# Allegro board esp8266bee.brd
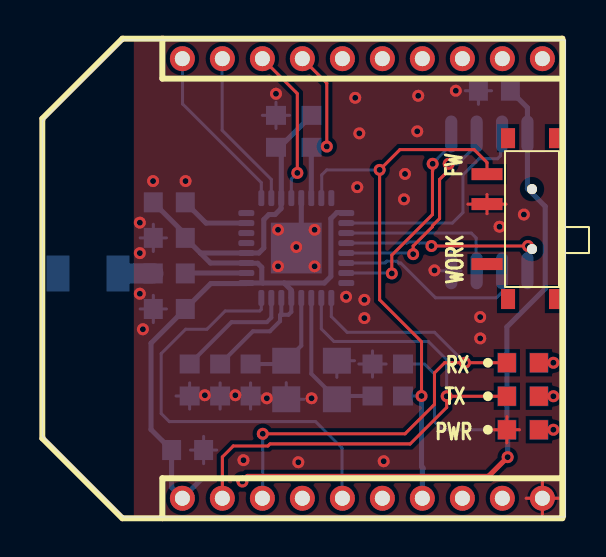
[diagram p0: board, top side]
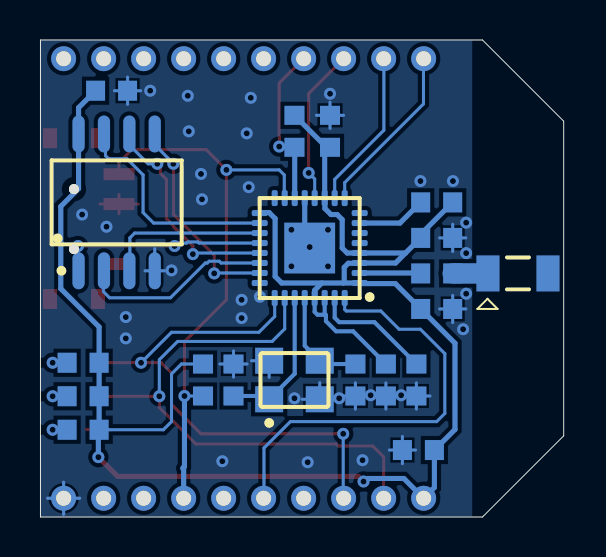
[diagram p1: board, bottom side, seen from below]

Outline 26.16 x 23.88 mm; copper layers: TOP, BOTTOM. Coordinates in mm from the lower left corner of the outline.
Outline path: 0,19.81 4.06,23.88 26.16,23.88 26.16,0 4.06,0 0,4.06 0,19.81

## Placement (name value [footprint] x y rotation side)
A1  -  [ANT1206]  2.29 12.19 180 bottom
A2  -  [BEE_SOCKET]  7 0.94 0 top
C1  -  [STD0603]  6.35 10.41 0 bottom
C2  -  [STD0603]  7.26 3.35 180 bottom
C13  -  [STD0603]  6.35 13.97 0 bottom
C14  -  [STD0603]  11.68 19.3 270 bottom
C18  -  [STD0603]  8.89 6.86 90 bottom
C19  -  [STD0603]  22.61 21.34 0 bottom
C20  -  [STD0603]  16.51 6.86 270 bottom
C21  -  [STD0603]  10.41 6.86 90 bottom
C27  -  [STD0603]  6.35 12.19 180 bottom
D1  -  [LED0603]  24.03 4.37 0 top
D2  -  [LED0603]  24.03 7.72 0 top
D3  -  [LED0603]  24.03 6.05 0 top
NOREF  -  []  25 0.94 90 top
NOREF#2  -  []  0 0 90 top
NOREF#3  -  []  0 0 0 top
NOREF#4  -  []  23 22.94 0 top
NOREF#5  -  []  0 0 90 top
R1  -  [STD0603]  24.03 4.37 0 bottom
R2  -  [STD0603]  24.03 7.72 0 bottom
R3  -  [STD0603]  24.03 6.05 0 bottom
R4  -  [STD0603]  7.37 6.86 270 bottom
R5  -  [STD0603]  13.46 19.3 90 bottom
R6  -  [STD0603]  6.35 15.75 180 bottom
R7  -  [STD0603]  18.03 6.86 90 bottom
S1  -  [1P2T_SMT]  27.34 19.56 180 top
U3  val  [QFN50P500X500X80-33A]  12.7 13.46 0 bottom
U6  val  [SOIC127P780X200-8]  22.35 15.75 180 bottom
X2  val  [OSCCC250X320X100]  13.46 6.86 90 bottom

## Library data of the parts
A1 = ANT-SE: part number: ANT-SE-2450AT18B100E,1
A2 = BEE: part number: BEE-BEE,1
C1 C2 C13 C14 = CAP: part number: CAP-10UF/25V/0603,1
C18-C21 = CAP: part number: CAP-12PF/50V/0603,1
C27 = CAP: part number: CAP-10PF/50V/0603,1
D1 = LED: part number: LED-GREEN,1
D2 = LED: part number: LED-RED,1
D3 = LED: part number: LED-BLUE,1
R1-R3 = RES: part number: RES-1KR|J|0603,1
R4 = RES: part number: RES-12K|K|0603,1
R5-R7 = RES: part number: RES-10KR|J|0603,1
S1 = S_1P2T: part number: S_1P2T-SMD_7P,1
U3 = ESP8266: User Part Number: pn; Tolerance: RichardLC
U6 = 25Q80BVSIG: User Part Number: pn; Tolerance: RichardLC
X2 = XTAL4P: User Part Number: /; Tolerance: RichardLC; part number: XTAL4P-26MHZ,1

## Footprints (pads in the part's own frame, mm; a bottom-side part is the same pattern mirrored in y, then rotated)
1P2T_SMT
  rect 0.701x1.001 smd: (1.651,8.651) (1.651,0.599) (4.049,8.651) (4.049,0.599)
  round 0.5 hole 0.8 unplated: (2.85,6.149) (2.85,3.15)
  rect 1.549x0.599 smd: 1(5.1,2.4) 2(5.1,3.899) 3(5.1,6.901)
ANT1206
  rect 1.151x1.801 smd: 1(-1.501,0) 2(1.501,0)
BEE_SOCKET
  round 1.25 hole 0.749: 1(0,0) 2(1.999,0) 3(4,0) 4(5.999,0) 5(8.001,0) 6(10,0) 7(11.999,0) 8(14,0) 9(15.999,0) 10(18.001,0) 11(18.001,21.999) 12(15.999,21.999) 13(14,21.999) 14(11.999,21.999) 15(10,21.999) 16(8.001,21.999) 17(5.999,21.999) 18(4,21.999) 19(1.999,21.999) 20(0,21.999)
LED0603
  rect 0.899x0.95 smd: A(0.8,0) C(-0.8,0)
OSCCC250X320X100
  rect 1.3x1.4 smd: 1(-0.965,1.265) 2(-0.965,-1.265) 3(0.965,-1.265) 4(0.965,1.265)
QFN50P500X500X80-33A
  custom 0.798x0.3 smd: 1(-2.499,1.75) 2(-2.499,1.25) 3(-2.499,0.749) 4(-2.499,0.249) 5(-2.499,-0.249) 6(-2.499,-0.749) 7(-2.499,-1.25) 8(-2.499,-1.75) 17(2.499,-1.75) 18(2.499,-1.25) 19(2.499,-0.749) 20(2.499,-0.249) 21(2.499,0.249) 22(2.499,0.749) 23(2.499,1.25) 24(2.499,1.75)
  custom 0.3x0.798 smd: 9(-1.75,-2.499) 10(-1.25,-2.499) 11(-0.749,-2.499) 12(-0.249,-2.499) 13(0.249,-2.499) 14(0.749,-2.499) 15(1.25,-2.499) 16(1.75,-2.499) 25(1.75,2.499) 26(1.25,2.499) 27(0.749,2.499) 28(0.249,2.499) 29(-0.249,2.499) 30(-0.749,2.499) 31(-1.25,2.499) 32(-1.75,2.499)
  rect 2.54x2.54 smd: 33(0,0)
SOIC127P780X200-8
  oval 0.61x1.849 smd: 1(-1.905,-3.424) 2(-0.635,-3.424) 3(0.635,-3.424) 4(1.905,-3.424) 5(1.905,3.424) 6(0.635,3.424) 7(-0.635,3.424) 8(-1.905,3.424)
STD0603
  rect 0.95x1.001 smd: 1(-0.8,0) 2(0.8,0)

## Nets
GND: A2.10(GND) C1.1 C2.1 C13.1 C14.1 C18.1 C19.1 C20.1 C21.1 D1.C R4.2 S1.2(COM) U3.13(MTDO) U3.33(GND) U6.4(GND) X2.2 X2.4
VCC-3V3: A2.1(VCC) C1.2 C2.2 C13.2 C14.2 C18.2 C19.2 R1.1 R2.1 R3.1 R5.2 R6.2 R7.2 U3.1(VDDA-1) U3.3(VDD3V3-1) U3.4(VDD3V3-2) U3.11(VDDPST-1) U3.17(VDDPST-2) U3.29(VDDD) U3.30(VDDA-2) U6.8(VCC)
E-CLK: U3.21(SDCLK) U6.6(CLK)
E-CMD: U3.20(SDCMD) U6.1(CS#)
E-D0: U3.22(SDIO0) U6.2(DO)
E-D1: U3.23(SDIO1) U6.5(DI)
E-D2: U3.18(SDIO2) U6.7(HOLD#)
E-D3: U3.19(SDIO3) U6.3(WP#)
E-EN: R6.1 U3.7(EN)
E-FW: A2.7 R7.1 S1.1(A) U3.15(GPIO0)
E-RST: A2.5(RESET) U3.32(RST#)
E-RX: A2.3(DIN) D2.C U3.25(RXD)
E-TX: A2.2(DOUT) D3.C U3.26(TXD)
IO1: A2.20 U3.9(MTMS)
IO2: A2.19 U3.10(MTDI)
IO3: A2.18 U3.12(MTCK)
IO4: A2.17 R5.1 U3.14(GPIO2)
UNNAMED_1_ANT-SE_I30_1: A1.1 C27.2
UNNAMED_1_CAP_I20_2: C20.2 U3.27(XTALO) X2.1(XTAL1)
UNNAMED_1_CAP_I22_2: C21.2 U3.28(XTALI) X2.3(XTAL2)
UNNAMED_1_CAP_I39_1: C27.1 U3.2(LNA)
UNNAMED_1_ESP8266_I41_RES12K: R4.1 U3.31(RES12K)
UNNAMED_1_LED_I45_A: D1.A R1.2
UNNAMED_1_LED_I50_A: D2.A R2.2
UNNAMED_1_LED_I54_A: D3.A R3.2

Pads without a net: A1 2; A2 4 6 8 9 11 12 13 14 15 16; S1 3; U3 5 6 8 16 24

## Via types
v1: diameter 0.599, hole 0.3, TOP to BOTTOM, 53 vias

## Routing (per net, layer and track width the routed paths; a pad name or vN(x,y) marks a point on that pad's centre or on a via; arc(x,y) is an arc through that point)
GND: length 44.9
  TOP w0.152: 25,0.13 A2.10 ; A2.10 25,1.74 ; A2.10 24.2,0.94 ; A2.10 25.81,0.94 ; 21.28,15.66 S1.2 ; S1.2 22.24,16.14 ; S1.2 23.19,15.66 ; S1.2 22.24,15.18 ; D1.C 23.23,5.02 ; D1.C 22.6,4.37 ; D1.C 23.86,4.37 ; D1.C 23.23,3.71
  BOTTOM w0.152: C13.1 6.21,13.97 ; C13.1 5.55,14.65 ; C13.1 5.55,13.29 ; C13.1 4.89,13.97 ; C1.1 5.55,11.09 ; C1.1 5.55,9.73 ; C1.1 4.89,10.41 ; C1.1 6.21,10.41 ; 21.15,21.34 C19.1 ; C19.1 22.46,21.34 ; C19.1 21.81,22.02 ; C19.1 21.81,20.66 ; 19.96,12.32 U6.4 ; U6.4 20.45,13.43 ; U6.4 20.93,12.32 ; 15.83,7.66 C20.1 ; C20.1 16.51,7 ; C20.1 16.51,8.31 ; C20.1 17.19,7.66 ; A2.10 25.81,0.94 ; A2.10 25,0.13 ; A2.10 24.2,0.94 ; A2.10 25,1.74 ; 10.41,5.4 C21.1 ; C21.1 11.09,6.06 ; C21.1 10.41,6.71 ; C21.1 9.73,6.06 ; 11,20.1 C14.1 ; C14.1 11.68,20.76 ; C14.1 11.68,19.45 ; C14.1 12.36,20.1 ; 6.69,6.06 R4.2 ; R4.2 8.05,6.06 ; R4.2 7.37,6.71 ; R4.2 7.37,5.4 ; 7.41,3.35 C2.1 ; C2.1 8.06,2.67 ; C2.1 8.06,4.03 ; C2.1 8.72,3.35 ; 14.73,6.99 X2.4 15.61,7.82 ; 11.32,5.89 X2.2 ; X2.2 12.2,6.72 ; X2.2 13.08,5.89 ; 8.21,6.06 C18.1 ; C18.1 9.57,6.06 ; C18.1 8.89,6.71 ; C18.1 8.89,5.4
  BOTTOM w0.254: U3.13 12.95,13.71 U3.33
  vias: v1(4.88,14.73) v1(4.88,13.21) v1(4.88,11.18) v1(5.03,9.4) v1(5.54,16.81) v1(7.16,16.81) v1(8.13,6.1) v1(9.65,6.1) v1(10.06,2.84) v1(11.23,5.94) v1(11.68,21.18) v1(11.79,14.38) v1(11.79,12.55) v1(12.7,13.51) v1(12.8,2.74) v1(13.46,5.94) v1(13.61,14.38) v1(13.61,12.55) v1(15.19,11.02) v1(15.65,20.98) v1(15.75,16.51) v1(15.85,19.2) v1(16.1,10.87) v1(16.1,9.96) v1(17.07,2.79) v1(18.14,17.17) v1(18.08,15.9) v1(18.75,19.3) v1(18.8,21.08) v1(19.61,12.34) v1(20.68,21.34) v1(21.89,10.01) v1(21.89,8.94) v1(22.86,14.53) v1(24.08,15.14)
VCC-3V3: length 94
  TOP w0.254: v1(23.27,3) 22.3,2.03 10.26,2.03 v1(10.01,1.78)
  BOTTOM w0.152: R7.2 19.11,7.66 19.61,7.16 19.61,4.78 20.02,4.37 R1.1
  BOTTOM w0.203: 11.95,10.17 11.89,10.11 11.89,9.8 11.38,9.3 10.53,9.3 C18.2 ; 11.95,10.17 U3.30 ; 11.95,10.17 12,10.12 12.31,10.12 12.45,10.27 U3.29
  BOTTOM w0.254: v1(23.27,3) 23.27,4.33 R1.1 R3.1 R2.1 23.23,9.51 25.15,11.43 25.15,15.54 24.26,16.43 U6.8 24.26,20.49 C19.2 ; R6.2 7.15,14.15 C13.2 7.91,13.21 ; 11.02,11.71 U3.1 10.21,11.7 10.21,11.69 10.2,11.68 8.42,11.68 C1.2 5.44,8.7 5.44,4.38 C2.2 6.46,1.48 A2.1 7.99,1.93 9.8,1.93 9.96,1.78 v1(10.01,1.78) ; 11.02,11.71 10.97,11.76 10.97,12.5 10.77,12.7 10.21,12.7 U3.3 8.41,12.71 7.91,13.21 ; 11.02,11.71 12.09,11.71 ; U3.17 15.17,15.24 14.73,15.24 14.43,14.94 14.43,12.04 14.1,11.71 12.09,11.71 ; 12.09,11.71 12.45,11.36 12.45,10.97 U3.29 ; 7.91,13.21 U3.4 10.83,13.21 11.07,13.46 11.07,14.88 11.33,15.14 11.64,15.14 11.94,15.44 11.94,15.95 U3.11 11.95,18.24 C14.2 11.86,18.5 R5.2
E-CLK: length 11
  TOP w0.152: v1(18.54,13.16) 18.54,13.56 19.51,14.53 19.51,14.58 19.86,14.94 19.86,16.9 20.17,17.2 20.17,17.53 v1(20.32,17.68)
  BOTTOM w0.152: U6.6 21.72,18.62 20.78,17.68 v1(20.32,17.68) ; U3.21 18.49,13.21 v1(18.54,13.16)
E-CMD: length 10.4
  TOP w0.152: v1(19.46,13.56) v1(24.28,13.56)
  BOTTOM w0.152: v1(24.28,13.56) 24.28,12.35 U6.1 ; v1(19.46,13.56) 19.31,13.71 18.85,13.71 18.8,13.77 18.29,13.77 18.23,13.71 U3.20
E-D0: length 9.8
  BOTTOM w0.152: U3.22 17.13,12.71 17.22,12.8 17.73,12.8 17.82,12.71 17.92,12.71 19.66,10.97 22.71,10.97 23.01,11.28 23.01,12.3 U6.2
E-D1: length 10.5
  TOP w0.152: v1(17.48,12.19) 17.48,13.11 19.51,15.14 19.51,17.31 19.52,17.32 v1(19.52,17.68)
  BOTTOM w0.152: v1(19.52,17.68) 19.74,17.9 19.74,17.92 20.45,18.63 U6.5 ; v1(17.48,12.19) 17.45,12.21 U3.23
E-D2: length 11.3
  BOTTOM w0.152: U3.18 20.5,14.71 21.03,15.24 21.03,17.12 21.84,17.93 22.76,17.93 22.91,18.08 22.91,19.1 U6.7
E-D3: length 8.2
  BOTTOM w0.152: U6.3 21.69,12.35 21.69,13.97 21.45,14.21 U3.19
E-EN: length 3.5
  BOTTOM w0.254: R6.1 8.19,14.71 U3.7
E-FW: length 29.1
  TOP w0.152: S1.1 22.24,17.74 21.59,18.39 17.88,18.39 v1(16.87,17.37) 16.87,10.87 18.96,8.78 v1(18.96,6.06)
  BOTTOM w0.152: v1(16.87,17.37) 14.22,17.37 13.97,17.12 13.97,15.98 U3.15 ; R7.1 v1(18.96,6.06)
  BOTTOM w0.254: 19,2.49 18.96,2.53 v1(18.96,6.06) ; 19,2.49 19.05,2.44 ; 19,2.49 A2.7
E-RST: length 21.8
  BOTTOM w0.152: U3.32 10.95,10.39 10.87,10.31 9.14,10.31 8.23,9.4 7.16,9.4 5.94,8.18 5.94,5.18 6.35,4.78 13.67,4.78 14.99,3.45 14.99,0.96 A2.5
E-RX: length 26.4
  TOP w0.152: D2.C v1(21.13,7.72) 20.12,7.72 19.61,7.21 19.61,5.64 18.14,4.17 v1(11.02,4.17)
  BOTTOM w0.152: v1(11.02,4.17) 11.02,0.96 A2.3 ; v1(21.13,7.72) 19.61,9.25 15.24,9.25 14.45,10.04 U3.25
E-TX: length 28.2
  TOP w0.152: A2.2 9,3.01 9.55,3.56 11.28,3.56 11.38,3.66 18.39,3.66 20.22,5.49 v1(20.22,6.05) D3.C
  BOTTOM w0.152: U3.26 13.95,9.42 14.58,8.79 19.3,8.79 20.22,7.87 v1(20.22,6.05)
IO1: length 8.6
  BOTTOM w0.152: A2.20 7.01,22.93 7.01,20.68 10.95,16.74 U3.9
IO2: length 8
  BOTTOM w0.152: U3.10 11.45,16.9 8.99,19.35 8.99,22.93 A2.19
IO3: length 7.8
  TOP w0.152: v1(12.75,17.22) 12.75,21.19 A2.18
  BOTTOM w0.152: v1(12.75,17.22) 12.45,16.92 U3.12
IO4: length 8.2
  TOP w0.152: A2.17 14.22,21.72 v1(14.22,18.54)
  BOTTOM w0.152: v1(14.22,18.54) 14.19,18.5 R5.1
  BOTTOM w0.254: U3.14 13.45,18.49 R5.1
UNNAMED_1_ANT-SE_I30_1: length 1.8
  BOTTOM w1.016: C27.2 A1.1
UNNAMED_1_CAP_I20_2: length 7.5
  BOTTOM w0.203: U3.27 13.45,7.17 X2.1 14.89,6.06 C20.2
UNNAMED_1_CAP_I22_2: length 5.3
  BOTTOM w0.203: C21.2 12.03,7.66 X2.3 12.95,8.58 U3.28
UNNAMED_1_CAP_I39_1: length 3.1
  BOTTOM w0.254: C27.1 7.17,12.21 U3.2
UNNAMED_1_ESP8266_I41_RES12K: length 6
  BOTTOM w0.203: U3.31 11.45,9.98 11.23,9.75 9.46,9.75 R4.1
UNNAMED_1_LED_I45_A: length 1.4
  TOP w0.152: D1.A v1(25.55,4.37)
  BOTTOM w0.152: v1(25.55,4.37) D1.A
UNNAMED_1_LED_I50_A: length 1.4
  TOP w0.152: D2.A v1(25.55,7.72)
  BOTTOM w0.152: v1(25.55,7.72) D2.A
UNNAMED_1_LED_I54_A: length 1.4
  TOP w0.152: v1(25.55,6.05) D3.A
  BOTTOM w0.152: D3.A v1(25.55,6.05)

## Copper pours and planes (outline as drawn; the poured copper is in the pictures)
GND on TOP: 4.57,0 4.57,23.87 26.16,23.87 26.16,0
GND on BOTTOM: 4.57,0 4.57,23.87 26.16,23.87 26.16,0 ; 6 cut-outs

## Text on the board
Ref Des/Silkscreen Top: PWR | TX | RX | FW | WORK
DIMENSION: Unit:mm
DEVICE_TYPE_BOTTOM: FIGURE | SIZE | 11.8 | 29.5 | 31.5 | DRILL CHART: TOP to BOTTOM | ALL UNITS ARE IN MILS | PLATED | NON-PLATED | QTY | 53 | 20 | 2
